# Altium PCB PCB_PRO_OK_08-08-2011.PcbDoc (part 1 of 2)
Units mil, origin at the board's own origin, x right, y up, seen from the top; angles counter-clockwise.
Board outline 6942 x 4824 mil, 2 copper layers (Top Layer, Bottom Layer); 164 components, 92 nets, 659 pads, 68 vias.
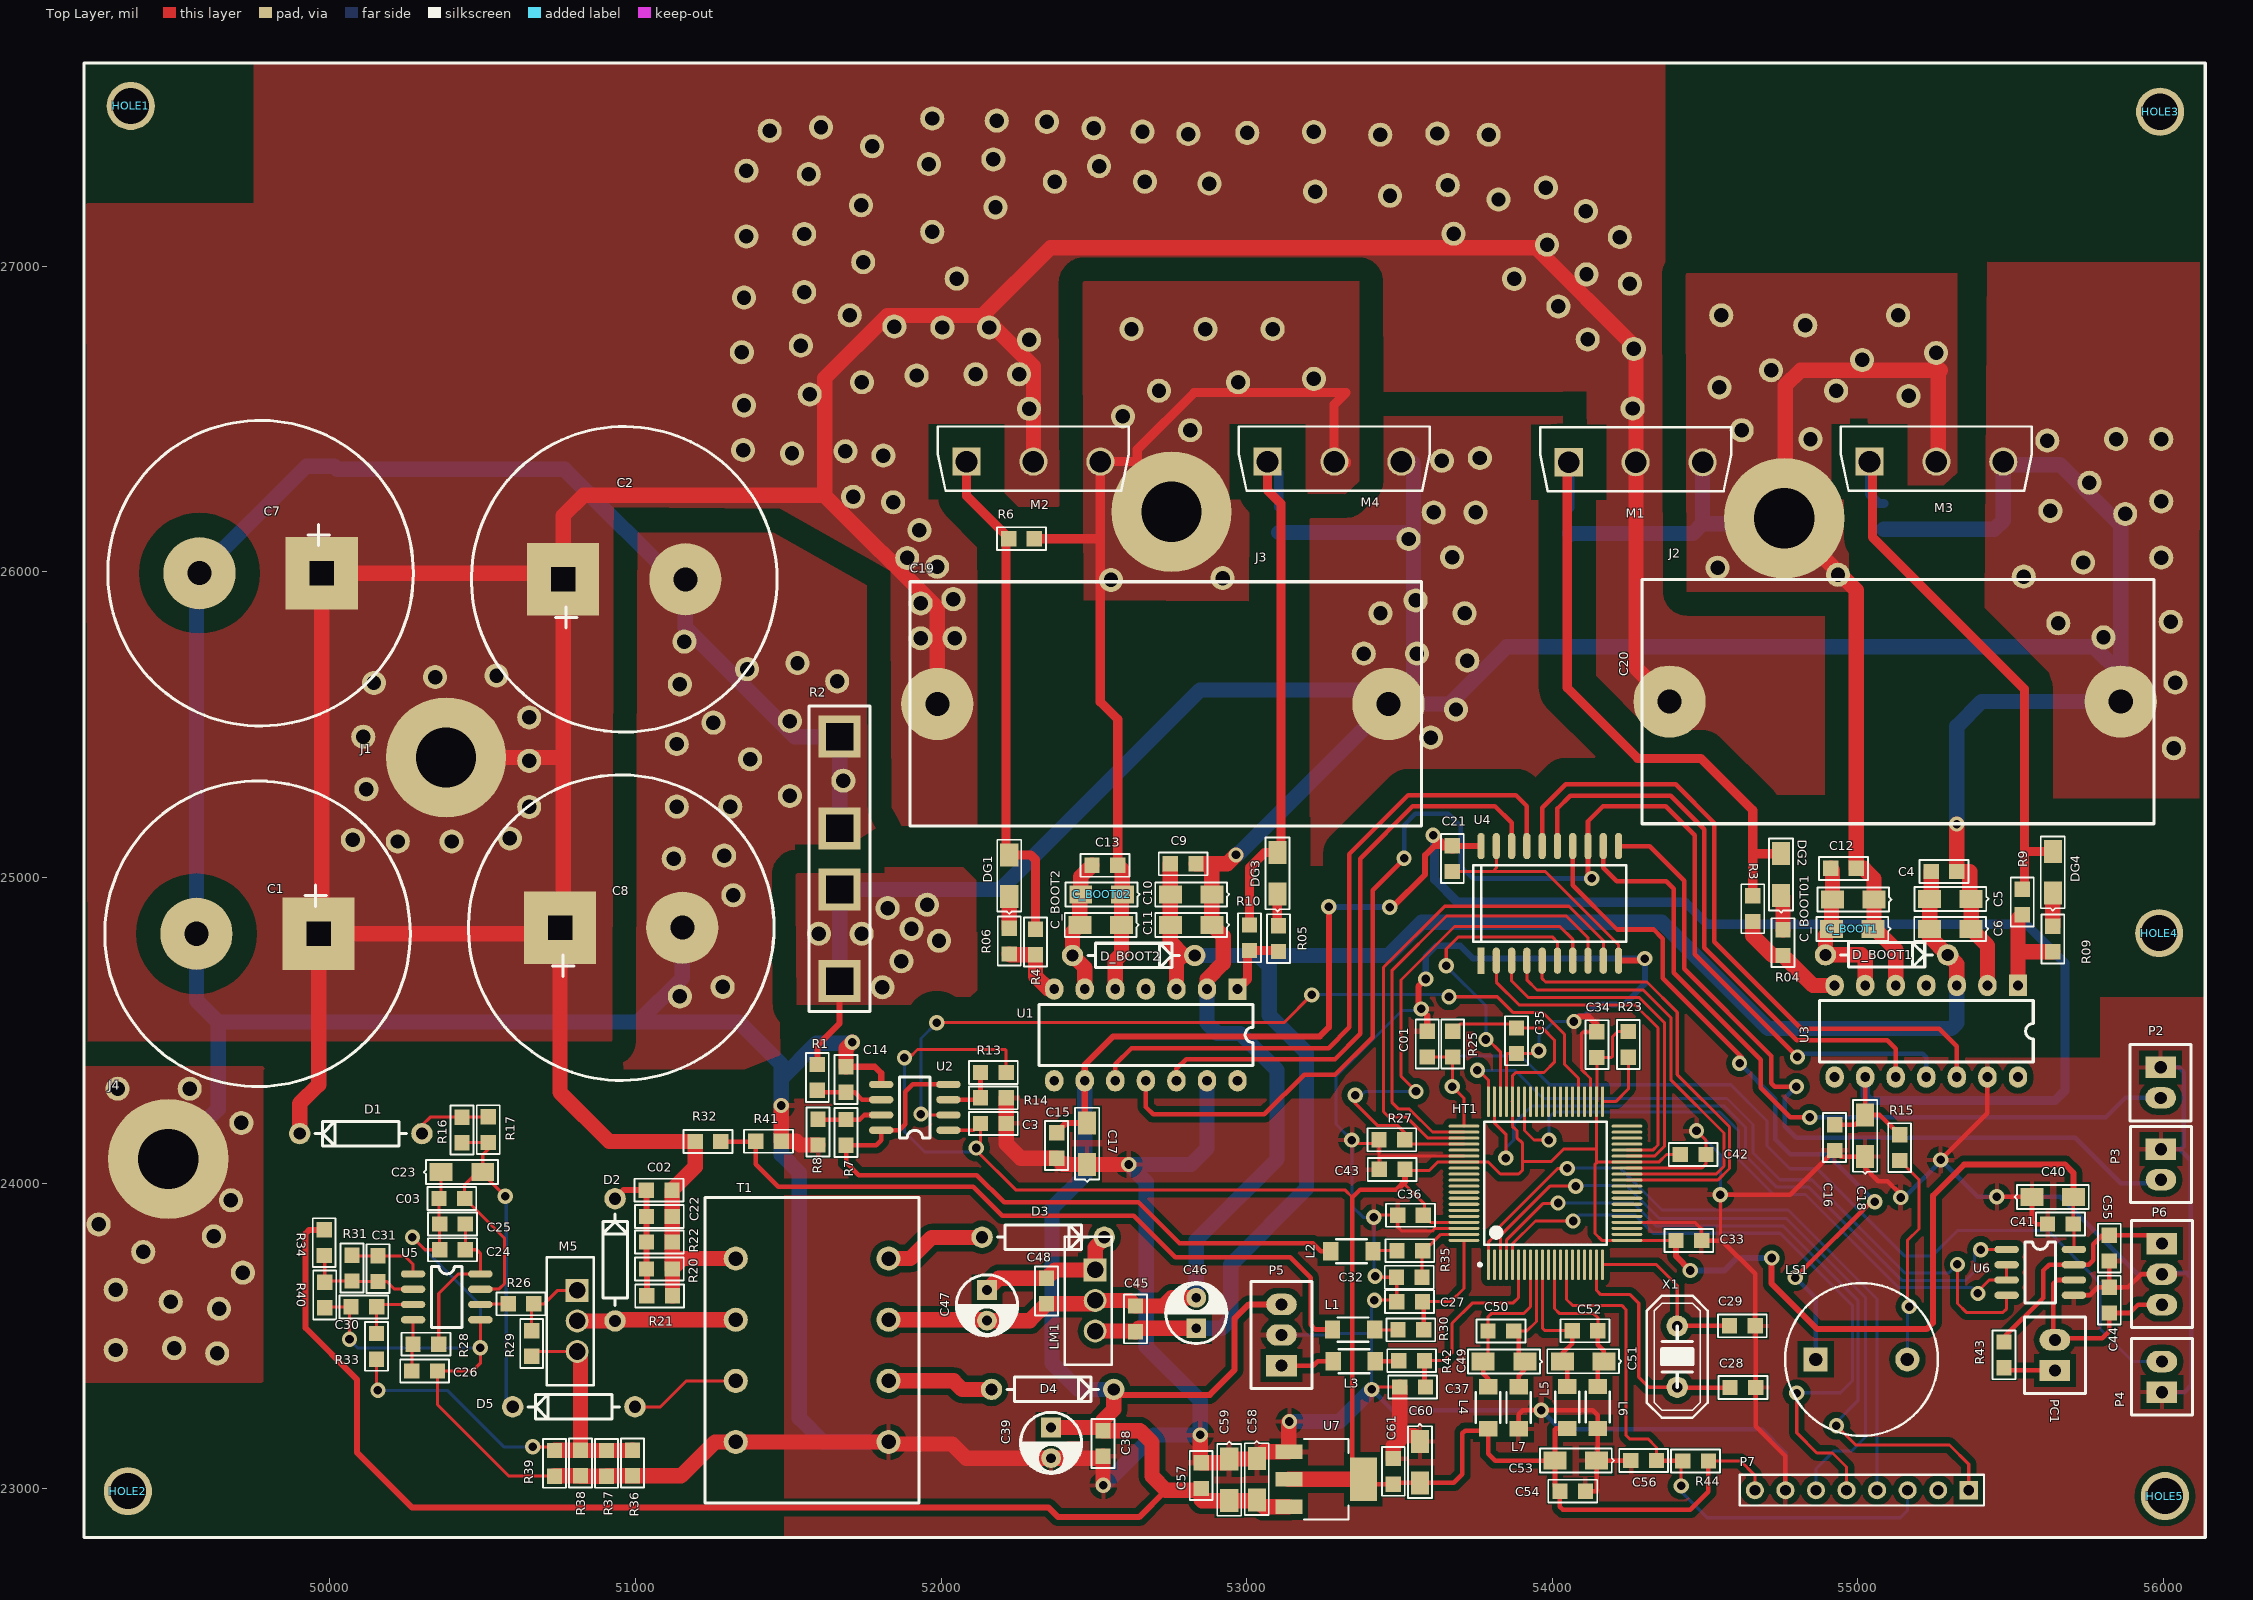
[diagram p0: Top Layer view]
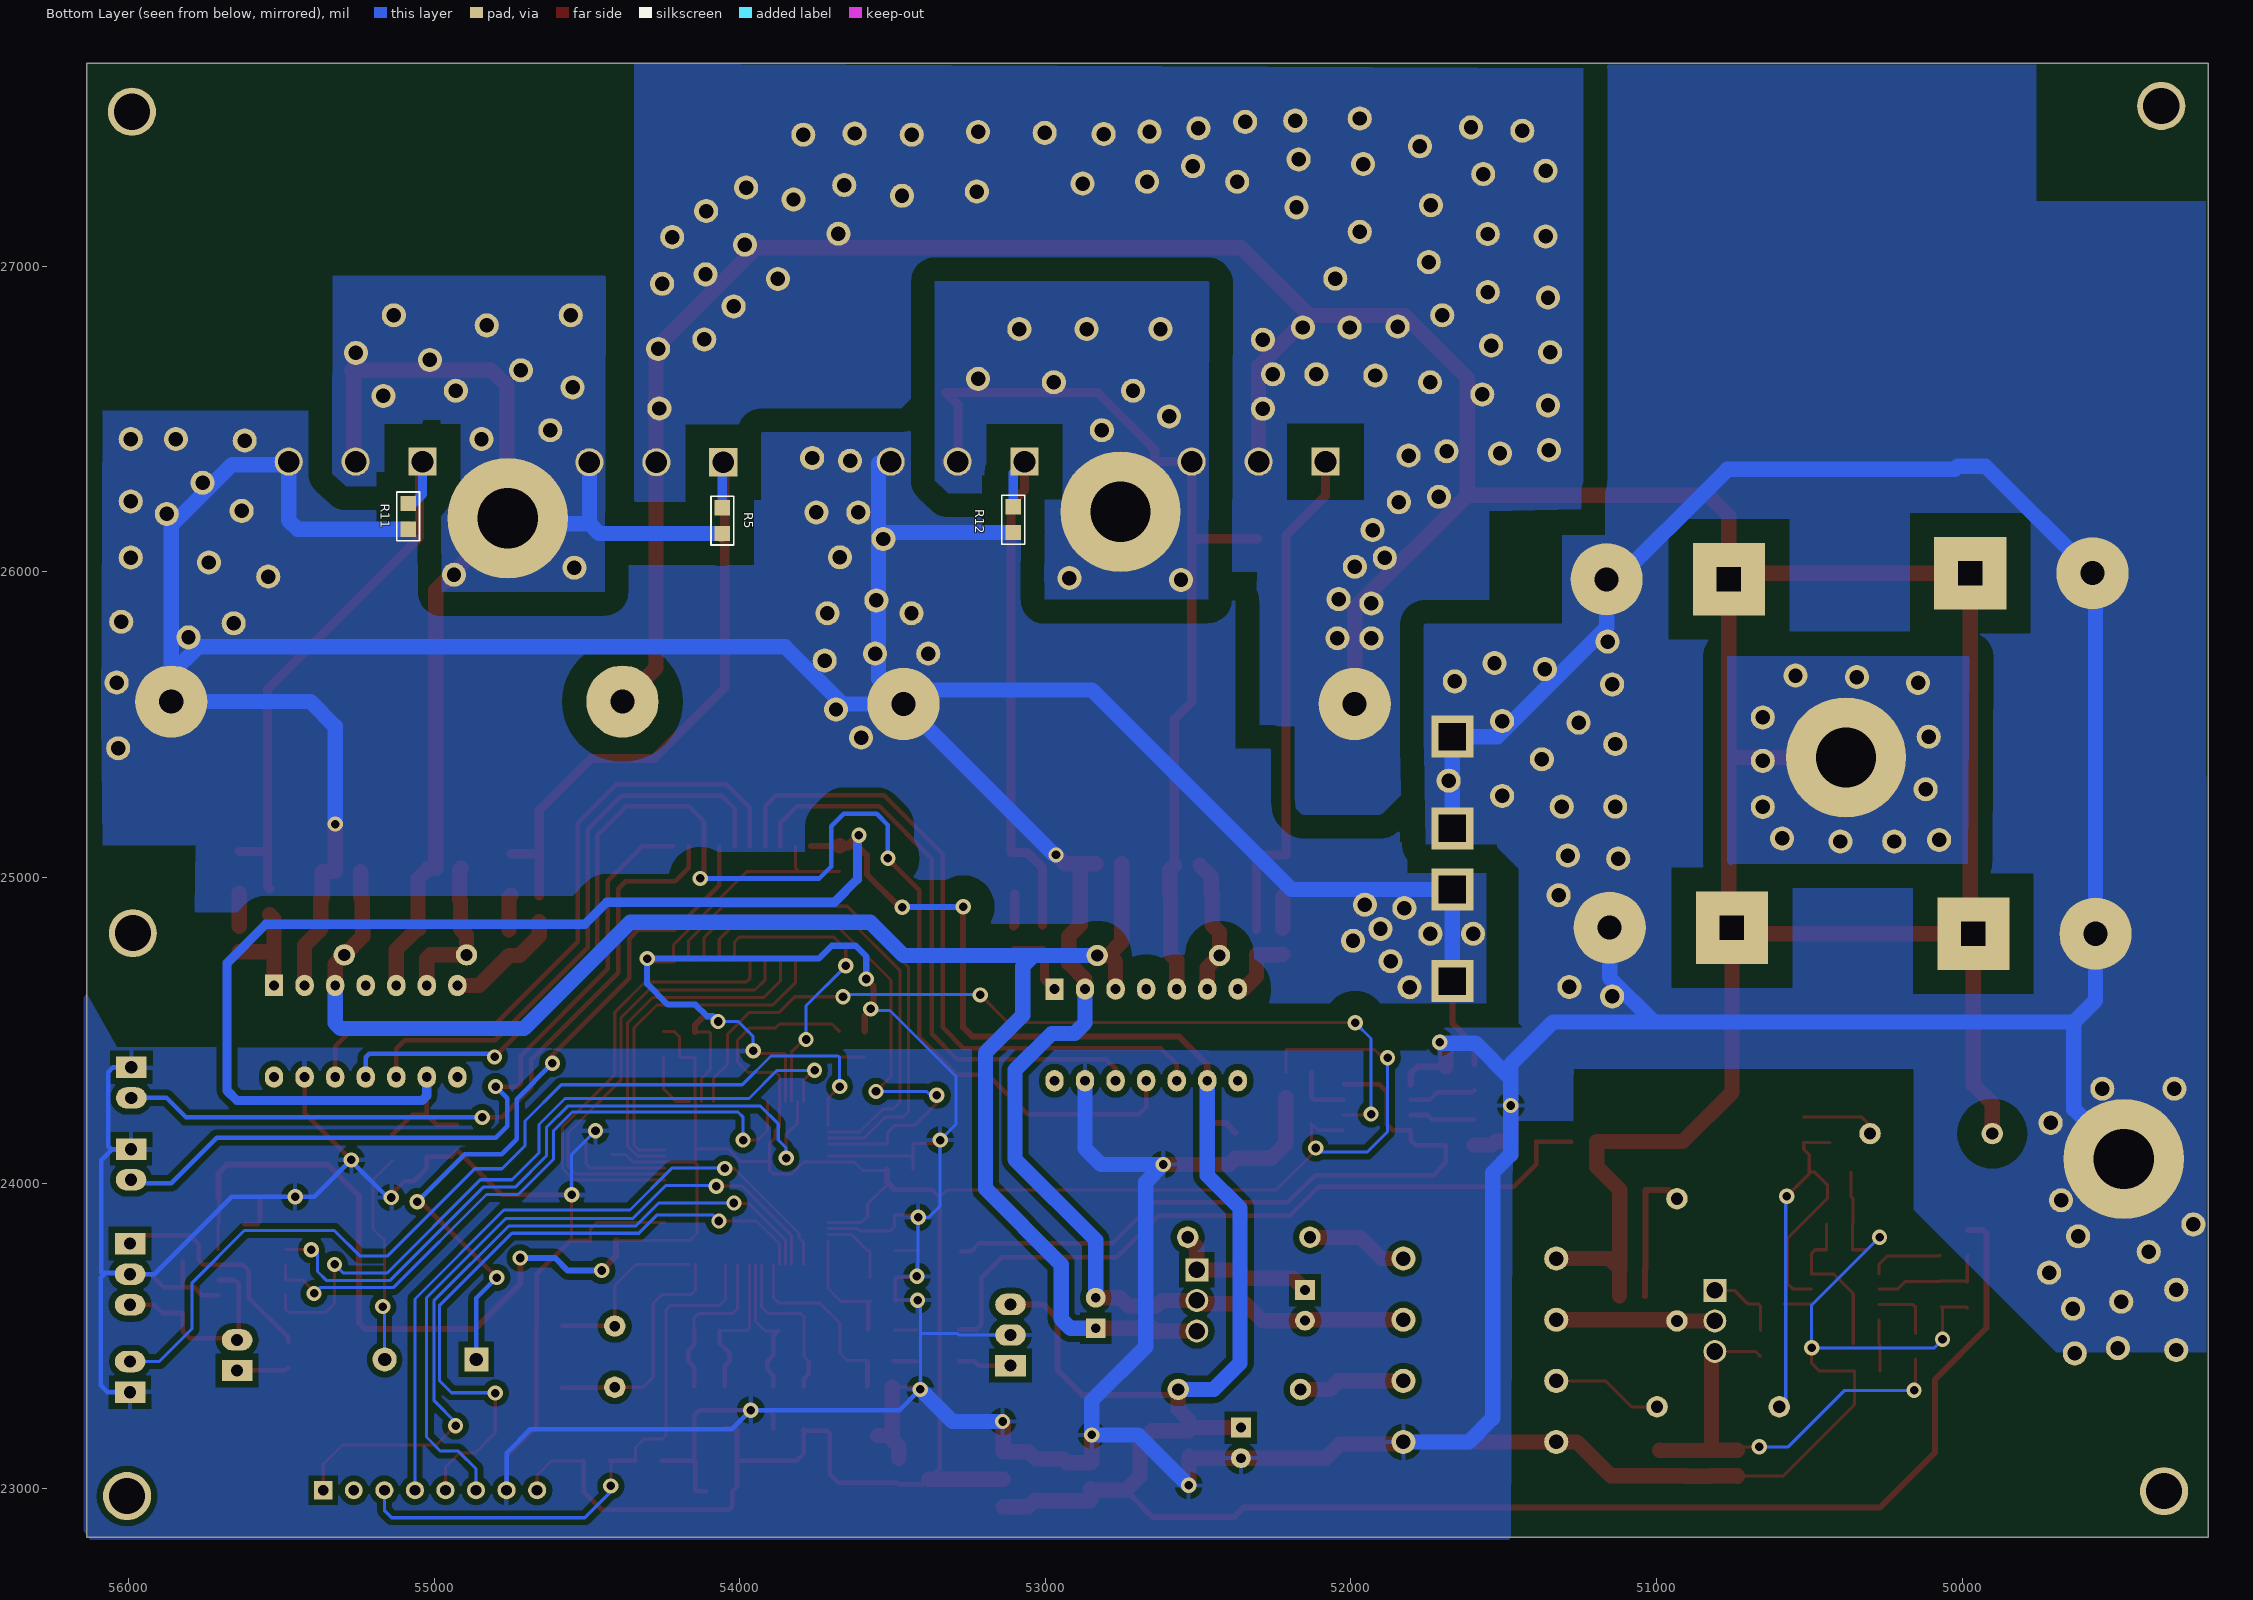
[diagram p1: Bottom Layer view, seen from below]

## Layer stack, top to bottom
Top Layer: signal copper 1.4
Dielectric: dielectric 12.6, FR-4, Dk 4.8
Bottom Layer: signal copper 1.4

## Board outline
49195,22841 56137,22841 56137,27665 49195,27665

## Design rules (kind name [scope] priority, off if disabled: settings)
Clearance YEN_CONTROL_1 [InNamedPolygon('GND_BOT_VSL') Or  InNamedPolygon('GND_CONTROL')] p1: gap=19.68
Clearance YEN_POWER_3 [InNamedPolygon('48V_VDC') Or  InNamedPolygon('GND_TOP_POWER') Or  InNamedPolygon('AC_OUT_TOP10') Or  InNamedPolygon('COM_S') Or  InNamedPolygon('48V_M+') Or  InNamedPolygon('COMS_SHUN') Or  InNamedPolygon('AC_OUT_TOP1') Or  InNamedPolygon('BOT_48V_BAT') Or  InNamedPolygon('COM_S_TOP') Or  InNamedPolygon('AC_OUT_TOP2') Or  InNamedPolygon('COM_S_TOP1') Or  InNamedPolygon('GND_SHUN') Or  InNamedPolygon('BOT_GND_BAT') Or  InNamedPolygon('AC_OUT_TOP3')] p2: gap=78.74
Clearance [All] p3: gap=8
ComponentClearance [All] p1: gap=0 collisioncheckmode=3 verticalgap=0 showdistances=FALSE
HoleSize [All] p1: absolutevalues=TRUE maxlimit=200 minlimit=1 maxpercent=80.000 minpercent=20.000
HoleToHoleClearance [All] p1: gap=8 allowstackedmicrovias=TRUE
MinimumSolderMaskSliver [All] p1: minsoldermaskwidth=1
PolygonConnect YEN_CONTROL [All vs IsNamedPolygon('GND_BOT_VSL') Or  IsNamedPolygon('GND_CONTROL')] p1: connectstyle=Relief reliefconductorwidth=15 reliefentries=4 polygonreliefangle="90 Angle"
PolygonConnect YEN_POWER [All vs IsNamedPolygon('BOT_48V_BAT') Or  IsNamedPolygon('AC_OUT_TOP1') Or  IsNamedPolygon('COM_S_TOP1') Or  IsNamedPolygon('GND_SHUN') Or  IsNamedPolygon('GND_TOP_POWER') Or  IsNamedPolygon('AC_OUT_TOP3') Or  IsNamedPolygon('AC_OUT_TOP10') Or  IsNamedPolygon('COM_S_TOP') Or  IsNamedPolygon('AC_OUT_TOP2') Or  IsNamedPolygon('COMS_SHUN') Or  IsNamedPolygon('48V_M+') Or  IsNamedPolygon('BOT_GND_BAT') Or  IsNamedPolygon('48V_VDC') Or  IsNamedPolygon('COM_S')] p2: connectstyle=Direct reliefconductorwidth=10 reliefentries=4 polygonreliefangle="90 Angle"
PolygonConnect [All] p3: connectstyle=Relief reliefconductorwidth=10 reliefentries=4 polygonreliefangle="90 Angle"
RoomDefinition overview [InComponentClass('overview')] p1: confinementstyle=ConfineIn formatcopy=TRUE lockcomponents=FALSE outline 48945,22757 56212,22757 56212,27795 48945,27795
RoutingVias [All] p1: holewidth=28 width=50 viastyle="Through Hole" minholewidth=28 minwidth=50 maxholewidth=28 maxwidth=50
SilkToSilkClearance [All] p1: silktosilkclearance=0
SilkscreenOverComponentPads [All] p1: minsilkscreentomaskgap=0
SolderMaskExpansion [All] p1: expansion=4
Width [All] p1: maxlimit=100 minlimit=10 preferedwidth=10
22 further rules are at their usual default settings.

## Classes and differential pairs
polygon class BOT_GND_BAT: BOT_GND_BAT

## Components (designator, comment, footprint, x,y, rotation, side; value= is the part's Value field where it differs from the comment)
C01 "CX4" C0805#1 53431,24953 r270 top
C1 "3300uF-100V" 3300uF_NEW 49563,24816 r0 top
C02 "CX4" C0805#1 51575,24137 r180 top
C2 "3300uF-100V" 3300uF_NEW 51163,25976 r180 top
C03 "CX4" C0805#1 50897,24110 r180 top
C3 "CX4" C0805#2 52669,24035 r180 top
C4 "cap SMD" C0805#1 55780,25180 r180 top
C5 "10uF" CAP_10uF_SMD#1 55163.3,25342.8 r270 top
C6 "10uF" CAP_10uF_SMD#1 55162.3,25244.8 r270 top
C7 "3300uF-100V" 3300uF_NEW 49573,25996 r0 top
C8 "3300uF-100V" 3300uF_NEW 51153,24836 r180 top
C9 "cap SMD" C0805#1 53290,25205 r180 top
C10 "10uF" CAP_10uF_SMD#1 52678.3,25357.8 r270 top
C11 "10uF" CAP_10uF_SMD#1 52678.3,25257.8 r270 top
C12 "cap SMD" C0805#1 55451,25190 r180 top
C13 "cap SMD" C0805#1 53034,25200 r180 top
C14 "CX4" C0805#2 51849,24837 r270 top
C15 "CX4" C0805#1 52538,23625 r90 top
C16 "CX4" C0805#1 55084,23651 r90 top
C17 "CAP SMD1206" CAP_10uF_SMD#1 52890.8,24268.7 r180 top
C18 "CAP SMD1206" CAP_10uF_SMD#1 55436.8,24294.7 r180 top
C19 "polypropylen" 2.2UF-1000V_NEW 51987.62,25568 r0 top
C20 "polypropylen" 2.2UF-1000V_NEW 54384,25576 r0 top
C21 "cap SMD" C0805#1 53833,24564 r90 top
C22 "CX4" C0805#1 51576,24051 r180 top
C23 "CAP SMD1206" CAP_10uF_SMD#1 50571.7,23623.2 r90 top
C24 "CX4" C0805#1 50899,23942 r180 top
C25 "CX4" C0805#1 50899,24026 r180 top
C26 "CX4" C0805#1 49812,23225 r0 top
C27 "CX4" C0805#1 53035,23452 r0 top
C28 "CX4" C0805#1 55122,23491 r180 top
C29 "CX4" C0805#1 55120,23693 r180 top
C30 "CX4" C0805#1 49613,23435 r0 top
C31 "CX4" C0805#1 49997,24218 r270 top
C32 "CX4" C0805#1 53034,23532 r0 top
C33 "CX4" C0805#1 54945,23972 r180 top
C34 "CX4" C0805#1 53986,24951 r270 top
C35 "CX4" C0805#1 54043,23968 r90 top
C36 "CX4" C0805#1 53038,23735 r0 top
C37 "CX4" C0805#1 53045,23173 r0 top
C38 "CX4" C0805#1 52370,23646 r270 top
C39 "CAP SMD1206" Tu470 52775,23130 r180 top
C40 "10uF" CAP_10uF_SMD#1 55777.7,23542.2 r90 top
C41 "CX4" C0805#1 55165,23706 r0 top
C42 "CX4" C0805#1 54959,24254 r180 top
C43 "CX4" C0805#1 52978,23885 r0 top
C44 "CX4" C0805#1 55983,23119 r90 top
C45 "CX4" C0805#1 52796,23058 r90 top
C46 "CAP SMD1206" Tu470 52420,23595 r0 top
C47 "CAP SMD1206" Tu470 52565,23580 r180 top
C48 "CX4" C0805#1 52185,24145 r270 top
C49 "10uF" CAP_10uF_SMD#1 53702.3,23828.8 r270 top
C50 "CX4" C0805#1 54330,23676 r180 top
C51 "10uF" CAP_10uF_SMD#1 53961.3,23829.8 r270 top
C52 "CX4" C0805#1 54605,23677 r180 top
C53 "10uF" CAP_10uF_SMD#1 53937.3,23504.8 r270 top
C54 "CX4" C0805#1 54565,23152 r180 top
C55 "CX4" C0805#1 55983,23289 r90 top
C56 "CX4" C0805#1 53801,22932 r0 top
C57 "CX4" C0805#2 53011,23541 r270 top
C58 "CAP SMD1206" CAP_10uF_SMD#2 53445.8,22891.3 r180 top
C59 "CAP SMD1206" CAP_10uF_SMD#2 53355.8,22889.3 r180 top
C60 "CAP SMD1206" CAP_10uF_SMD#1 53154.2,22947.3 r0 top
C61 "CX4" C0805#1 53320,23555 r270 top
C_BOOT1 "10u" CAP_10uF_SMD#1 54842.3,25244.8 r270 top
C_BOOT01 "10u" CAP_10uF_SMD#1 54845.3,25340.8 r270 top
C_BOOT2 "10uF" CAP_10uF_SMD#1 52382.3,25257.8 r270 top
C_BOOT02 "10uF" CAP_10uF_SMD#1 52385.3,25357.8 r270 top
D1 "FR107" DIODE5819_V1 50031,24577 r270 top
D2 "FR107" DIODE5819_V1 51348,23819 r180 top
D3 "1N5819" DIODE5819_V1 52404,23408 r90 top
D4 "1N5819" DIODE5819_V1 52435,22910 r90 top
D5 "1N5819" DIODE5819_V1 50728,23683 r270 top
D_BOOT1 "UF4007" DIODE5819_V1 55164,24332 r90 top
D_BOOT2 "UF4007" DIODE5819_V1 52700,24330 r90 top
DG1 "4148" 4148_SMD 52009.67,25414.33 r270 top
DG2 "4148" 4148_SMD 54535.67,25418.33 r270 top
DG3 "4148" 4148_SMD 52887.67,25422.33 r270 top
DG4 "4148" 4148_SMD 55424.67,25425.33 r270 top
HOLE1 "HOLE1" HOLE 49623,27180 r90 top
HOLE2 "HOLE1" HOLE 49614,22647 r90 top
HOLE3 "HOLE1" HOLE 56264,27161 r90 top
HOLE4 "HOLE1" HOLE 56261,24473 r90 top
HOLE5 "HOLE1" HOLE 56280,22631 r90 top
HT1 "LPC175x" "PCBComponent_1 - duplicate" 53910.79,25266.73 r0 top
J1 "Socket" DAY_50A 50740,25533 r180 top
J2 "J1" DAY_50A 54899,25816 r90 top
J3 "J1" DAY_50A 52894,25837 r90 top
J4 "J1" DAY_50A 49611,23719 r90 top
L1 "Inductor" L_1uH 52826,23351 r0 top
L2 "Inductor" L_1uH 52820.21,23607 r0 top
L3 "Inductor" L_1uH 52828.21,23247 r0 top
L4 "Inductor" L_1uH 53620,23788.79 r270 top
L5 "Inductor" L_1uH 53879,23789.79 r270 top
L6 "Inductor" L_1uH 53979,23789.79 r270 top
L7 "Inductor" L_1uH 53720,23788.79 r270 top
LM1 "7812" TO220AB 52092.73,23439.83 r0 top
LS1 "SPEAKER" BUZZ 54843.7,23926.37 r270 top
M1 "IRFP4468PBF-ND" TO247AB 54054,26359 r0 top
M2 "IRFP4468PBF-ND" TO247AB 52083,26361 r0 top
M3 "IRFP4468PBF-ND" TO247AB 55038,26361 r0 top
M4 "IRFP4468PBF-ND" TO247AB 53068,26361 r0 top
M5 "IRF640" TO220AB 50397.73,23372.83 r0 top
P2 "Header 2" CONECTOR_2PIN 56056,24739 r270 top
P3 "Header 2" CONECTOR_2PIN 56057,24471 r270 top
P4 "Header 2" CONECTOR_2PIN 55930,22956 r90 top
P5 "LM35 -Temperature Sensors" CONECTOR_3PIN 53464,23563 r180 top
P6 "Header 3" CONECTOR_3PIN 55645,23642 r0 top
P7 "Header 8" HDR1X8 55363,22995 r180 top
PC1 "JUMPER" CONECTOR_2PIN 55580,23027 r90 top
R1 "Resistor SMD0805" R0805#1 51375,23918 r90 top
R2 "Shun" RES_SHUN 51668,25461 r270 top
R3 "Resistor SMD0805" R0805#2 54436,25326 r270 top
R4 "Resistor SMD0805" R0805#2 52529,24361 r90 top
R04 "Resistor SMD0805" R0805#2 54535,25215 r270 top
R5 "Resistor SMD0805" R0805#2 54277,26596 r270 bottom
R05 "Resistor SMD0805" R0805#2 53324,24372 r90 top
R6 "Resistor SMD0805" R0805#2 51835,25889 r0 top
R06 "Resistor SMD0805" R0805#2 52443,24364 r90 top
R7 "Resistor SMD0805" R0805#1 51909,24594 r270 top
R8 "Resistor SMD0805" R0805#1 51817,24595 r270 top
R9 "Resistor SMD0805" R0805#2 55318,25348 r270 top
R09 "Resistor SMD0805" R0805#2 55418,25227 r270 top
R10 "Resistor SMD0805" R0805#2 53229,24375 r90 top
R11 "Resistor SMD0805" R0805#2 55305,26610 r270 bottom
R12 "Resistor SMD0805" R0805#2 53325,26599 r270 bottom
R13 "Resistor SMD0805" R0805#1 52599,24142 r180 top
R14 "Resistor SMD0805" R0805#1 51743,24499 r0 top
R15 "Resistor SMD0805" R0805#2 55357,23688 r90 top
R16 "Resistor SMD0805" R0805#2 50212,24602 r270 top
R17 "Resistor SMD0805" R0805#2 50298,24603 r270 top
R20 "Resistor SMD0805" R0805#2 51506,23939 r180 top
R21 "Resistor SMD0805" R0805#2 51507,23851 r180 top
R22 "Resistor SMD0805" R0805#2 51506,24027 r180 top
R23 "Resistor SMD0805" R0805#2 54469,24026 r90 top
R25 "Resistor SMD0805" R0805#2 53894,24027 r90 top
R26 "Resistor SMD0805" R0805#2 51053,23825 r180 top
R27 "Resistor SMD0805" R0805#2 53047,23922 r0 top
R28 "Resistor SMD0805" R0805#2 49886,23253 r0 top
R29 "Resistor SMD0805" R0805#2 50440,23903 r270 top
R30 "Resistor SMD0805" R0805#2 53965,23740 r180 top
R31 "Resistor SMD0805" R0805#2 50292,23294 r90 top
R32 "Resistor SMD0805" R0805#2 51665,24356 r180 top
R33 "Resistor SMD0805" R0805#2 49932,23894 r270 top
R34 "Resistor SMD0805" R0805#2 50201,23377 r90 top
R35 "Resistor SMD0805" R0805#2 53962,23999 r180 top
R36 "Resistor SMD0805" R0805#2 50770,23512 r270 top
R37 "Resistor SMD0805" R0805#2 50685,23511 r270 top
R38 "Resistor SMD0805" R0805#2 50600,23512 r270 top
R39 "Resistor SMD0805" R0805#2 50515,23511 r270 top
R40 "Resistor SMD0805" R0805#2 50203,23206 r90 top
R41 "Resistor SMD0805" R0805#2 51863,24357 r180 top
R42 "Resistor SMD0805" R0805#2 53968,23639 r180 top
R43 "120" R0805#2 55258,23866 r270 top
R44 "Resistor SMD0805" R0805#2 54041,22871 r0 top
T1 "EE25" TRANSFORMER 51328,23753 r270 top
U1 "IR2110" 74HC14 53310,24600 r180 top
U2 "LM358" SOIC_8PIN#1 52322.86,24099.81 r180 top
U3 "IR2110" 74HC14 55864,24612 r180 top
U4 "74HCT245" 74HCT245D_STO163 53940.33,25197.6 r270 top
U5 "KA3842" SOIC_8PIN#2 50791,23776 r180 top
U6 "SN75176A" SOIC_8PIN#2 56005.86,23856.19 r180 top
U7 "LM1117S33" LM1117 53013,23426 r270 top
X1 "12MHZ" CRYSTAL_12Mhz 54562.14,23009.21 r90 top

## Footprints (in the part's own frame and the unit in brackets; to place one, negate y for a bottom-side part, rotate by r counter-clockwise, add the part's x,y. Pads: shape width x height; smd on the part's side, far side on the other; paste and mask are expansions set on the pad)
2.2UF-1000V_NEW [mm]
  round 6 hole 2: 1(0,0) 2(37.5,0)
  silkscreen extent -2.29,-10.16 40.26,10.16
74HC14 [mil]
  rect 60x70 hole 32: 1(340,-35)
  oval 60x70 hole 32: 2(440,-35) 3(540,-35) 4(640,-35) 5(740,-35) 6(840,-35) 7(940,-35) 8(940,265) 9(840,265) 10(740,265) 11(640,265) 12(540,265) 13(440,265) 14(340,265)
  silkscreen extent 290,15 990,215
74HCT245D_STO163 [mil]
  rect 86x24 smd: 1(469.6,-173.33)
  oval 86x24 smd: 2(469.6,-123.33) 3(469.6,-73.33) 4(469.6,-23.33) 5(469.6,26.67) 6(469.6,76.67) 7(469.6,126.67) 8(469.6,176.67) 9(469.6,226.67) 10(469.6,276.67) 11(94.6,276.67) 12(94.6,226.67) 13(94.6,176.67) 14(94.6,126.67) 15(94.6,76.67) 16(94.6,26.67) 17(94.6,-23.33) 18(94.6,-73.33) 19(94.6,-123.33) 20(94.6,-173.33)
  silkscreen extent 157,-198 407,302
3300uF_NEW [mm]
  rect 6x6 hole 2 square: 1(10.16,0)
  round 6 hole 2: 2(0,0)
  silkscreen extent -7.62,-12.7 17.78,12.7
4148_SMD [mil]
  rect 75.2x59.03 smd: 1(340.33,213.33) 2(476.33,213.33)
  silkscreen extent 291,174 533,253
BUZZ [mil]
  rect 78.73x78.73 hole 43.3: 1(503.37,18.3)
  round 78.73 hole 43.3: 2(503.37,318.3)
  silkscreen extent 253,-82 753,418
C0805#1 [mil]
  rect 50x50 smd: 1(456,160) 2(540,160)
  silkscreen extent 418,123 578,198
C0805#2 [mil]
  rect 50x50 smd: 1(456,-160) 2(540,-160)
  silkscreen extent 418,-197 578,-122
CAP_10uF_SMD#1 [mil]
  rect 59.03x75.2 smd: 1(412.8,71.7) 2(412.8,207.7)
  silkscreen extent 373,22 452,265
CAP_10uF_SMD#2 [mil]
  rect 59.03x75.2 smd: 1(412.8,-71.7) 2(412.8,-207.7)
  silkscreen extent 373,-265 452,-22
CONECTOR_2PIN [mil]
  rect 70x100 hole 40: 1(360,-65)
  oval 70x100 hole 40: 2(460,-65)
  silkscreen extent 285,-165 535,35
CONECTOR_3PIN [mil]
  rect 100x70 hole 40: 1(350,160)
  oval 100x70 hole 40: 2(350,60) 3(350,-40)
  silkscreen extent 250,-115 450,235
CRYSTAL_12Mhz [mil]
  round 70 / inner round 60 / far side round 70 hole 35 mask+8: 1(322.79,153.14) 2(522.79,153.14)
  silkscreen extent 223,53 623,253
DAY_50A [mm]
  round 10 hole 5: 1(9.144,3.556)
DIODE5819_V1 [mil]
  round 70 hole 40: 1(415,-130) 2(415,270)
  silkscreen extent 375,-80 455,220
HDR1X8 [mm] "Connector; Header; 8 Position"
  rect 1.5x1.5 hole 0.9: 1(0,0)
  round 1.5 hole 0.9: 2(2.54,0) 3(5.08,0) 4(7.62,0) 5(10.16,0) 6(12.7,0) 7(15.24,0) 8(17.78,0)
  silkscreen extent -1.27,-1.27 19.05,1.27
HOLE [mm]
  round 4 hole 3: 1(8.763,6.985)
L_1uH [mil]
  rect 50x60 smd: 1(455,170) 2(592.79,170)
  silkscreen extent 472,130 572,209
LM1117 [mil]
  rect 48x88 smd: 1(305,125) 2(395,125) 3(485,125)
  rect 142x88 smd: 4(395,369)
  silkscreen extent 263,174 527,320
"PCBComponent_1 - duplicate" [mil]
  oval 10x100.39 smd: 1(-120.01,-1533.73) 2(-100.32,-1533.73) 3(-80.64,-1533.73) 4(-60.95,-1533.73) 5(-41.27,-1533.73) 6(-21.58,-1533.73) 7(-1.9,-1533.73) 8(17.79,-1533.73) 9(37.47,-1533.73) 10(57.16,-1533.73) 11(76.84,-1533.73) 12(96.53,-1533.73) 13(116.21,-1533.73) 14(135.9,-1533.73) 15(155.58,-1533.73) 16(175.27,-1533.73) 17(194.95,-1533.73) 18(214.64,-1533.73) 19(234.32,-1533.73) 20(254.01,-1533.73) 41(254.01,-1000.27) 42(234.32,-1000.27) 43(214.64,-1000.27) 44(194.95,-1000.27) 45(175.27,-1000.27) 46(155.58,-1000.27) 47(135.9,-1000.27) 48(116.21,-1000.27) 49(96.53,-1000.27) 50(76.84,-1000.27) 51(57.16,-1000.27) 52(37.47,-1000.27) 53(17.79,-1000.27) 54(-1.9,-1000.27) 55(-21.58,-1000.27) 56(-41.27,-1000.27) 57(-60.95,-1000.27) 58(-80.64,-1000.27) 59(-100.32,-1000.27) 60(-120.01,-1000.27)
  oval 100.39x10 smd: 21(333.73,-1454.01) 22(333.73,-1434.32) 23(333.73,-1414.64) 24(333.73,-1394.95) 25(333.73,-1375.27) 26(333.73,-1355.58) 27(333.73,-1335.9) 28(333.73,-1316.21) 29(333.73,-1296.53) 30(333.73,-1276.84) 31(333.73,-1257.16) 32(333.73,-1237.47) 33(333.73,-1217.79) 34(333.73,-1198.1) 35(333.73,-1178.42) 36(333.73,-1158.73) 37(333.73,-1139.05) 38(333.73,-1119.36) 39(333.73,-1099.68) 40(333.73,-1079.99) 61(-199.73,-1079.99) 62(-199.73,-1099.68) 63(-199.73,-1119.36) 64(-199.73,-1139.05) 65(-199.73,-1158.73) 66(-199.73,-1178.42) 67(-199.73,-1198.1) 68(-199.73,-1217.79) 69(-199.73,-1237.47) 70(-199.73,-1257.16) 71(-199.73,-1276.84) 72(-199.73,-1296.53) 73(-199.73,-1316.21) 74(-199.73,-1335.9) 75(-199.73,-1355.58) 76(-199.73,-1375.27) 77(-199.73,-1394.95) 78(-199.73,-1414.64) 79(-199.73,-1434.32) 80(-199.73,-1454.01)
  silkscreen extent -152,-1539 268,-1066, body extent -150,-1484 284,-1050, height 59
R0805#1 [mil]
  rect 50x50 smd: 1(386,-220) 2(470,-220)
  silkscreen extent 348,-258 508,-182
R0805#2 [mil]
  rect 50x50 smd: 1(386,220) 2(470,220)
  silkscreen extent 348,183 508,258
RES_SHUN [mm]
  rect 3.5x3.5 hole 2.26 square: 1(0,0) 2(7.62,0) 3(12.7,0) 4(20.32,0)
  silkscreen extent -2.54,-2.54 22.86,2.54
SOIC_8PIN#1 [mil]
  oval 80x24 smd: 1(518.86,-73.19) 2(518.86,-123.19) 3(518.86,-173.19) 4(518.86,-223.19) 5(298.86,-223.19) 6(298.86,-173.19) 7(298.86,-123.19) 8(298.86,-73.19)
  silkscreen extent 359,-248 459,-48
SOIC_8PIN#2 [mil]
  oval 80x24 smd: 1(518.86,73.19) 2(518.86,123.19) 3(518.86,173.19) 4(518.86,223.19) 5(298.86,223.19) 6(298.86,173.19) 7(298.86,123.19) 8(298.86,73.19)
  silkscreen extent 359,48 459,248
TO220AB [mil]
  rect 75x75 hole 54: 1(411.27,276.17)
  round 75 hole 54: 2(411.27,176.17) 3(411.27,76.17)
  silkscreen extent 311,-35 465,385
TO247AB [mil]
  rect 92x92 hole 71: 1(0,0)
  round 92 hole 71: 2(219,0) 3(438,0)
  silkscreen extent -94,-95 532,115
TRANSFORMER [mm]
  round 2 hole 1.2: 1(0,0) 2(5.08,0) 3(10.16,0) 4(15.24,0) 5(15.24,12.7) 6(10.16,12.7) 7(5.08,12.7) 8(0,12.7)
  silkscreen extent -5.08,-2.54 20.32,15.24
Tu470 [mil]
  rect 65x65 hole 32: 1(415,-70)
  round 65 hole 32: 2(415,30)
  silkscreen extent 315,-120 515,80

## Part data
C01 C02 C03 C3 C4 C9 C12 C13 C14 C15 C16 C21 C22 C24 C25 C26 C27 C28 C29 C30 C31 C32 C33 C34 C35 C36 C37 C38 C41 C42 C43 C44 C45 C48 C50 C52 C54 C55 C56 C57 C61: library part Cap, "Capacitor Type 0805 SMD"
C1 C2 C5 C6 C7 C8 C10 C11: library part CAP
C17 C18 C23 C39 C46 C47 C58 C59 C60: library part Cap2, "Capacitor"
C19 C20: library part "Cap Semi", "Capacitor polypropylen"
C40 C49 C51 C53: library part C
C_BOOT1 C_BOOT01 C_BOOT2 C_BOOT02: library part C_Dup1
D1 D2 D3 D4 D5: library part 1N4148
D_BOOT1 D_BOOT2 DG1 DG2 DG4: library part DIODE
DG3: library part DIODE_0
HOLE1 HOLE2 HOLE3 HOLE4 HOLE5: library part Plug, "HOLE"
J2 J3 J4: library part Socket, "Socket"
L1 L2 L3 L4 L5 L6 L7: "Inductor Type 1206 SMD"
LM1: library part Component_1
M1 M2 M3 M4 M5: library part IRF540_Dup1
P2 P3 P4: "Header, 2-Pin"
P5: library part "Header 3", "Header, 3-Pin"
P6: "Header, 3-Pin"
P7: "Header, 8-Pin"
PC1: library part "Header 2", "Header, 2-Pin"
R1 R3 R4 R04 R5 R05 R6 R06 R7 R8 R9 R09 R10 R11 R12 R13 R14 R15 R16 R17 R20 R21 R22 R23 R25 R26 R27 R28 R29 R30 R31 R32 R33 R34 R35 R36 R37 R38 R39 R40 R41 R42 R44: library part Res1
R43: library part R
T1: library part TRAN_FBP1S4/SM_5
U1: library part IR2110_2
U2: library part LM2904/ON
U5: library part KA3842_1
U6: library part SN75176A_0
U7: library part LM117_0
X1: library part QZS10MEG_0, "Thach anh 12MHZ"

## Free pads (board coordinates)
  round 78.74 hole 47.24: 1(51933,25783) 2(52044,25783) 3(52040,25911) 4(51933,25897) 5(51889,26046) 6(51987,26017) 7(51929,26137) 8(51843,26228) 9(51712,26246) 10(51811,26381) 11(51687,26395) 12(51512,26388) 13(51352,26399) 14(51355,26545) 15(51348,26719) 16(51355,26898) 17(51363,27098) 18(51363,27313) 19(51439,27444) 20(51607,27455) 21(51567,27302) 22(51552,27106) 23(51552,26916) 24(51541,26741) 25(51570,26581) 26(51741,26621) 27(51920,26643) 28(52113,26647) 29(52255,26647) 30(52288,26534) 31(52288,26760) 32(52157,26800) 33(52004,26800) 34(51847,26803) 35(51701,26840) 36(51745,27014) 37(51738,27200) 38(51774,27393) 39(51960,27335) 40(51971,27113) 41(52051,26960) 42(51971,27484) 43(52182,27477) 44(52171,27350) 45(52178,27193) 46(52346,27473) 47(52372,27277) 48(52499,27452) 49(52517,27328) 50(52659,27441) 51(52667,27277) 52(52809,27433) 53(53002,27437) 54(53220,27440) 55(53437,27431) 56(53624,27435) 57(53792,27431) 58(53824,27219) 59(54110,27181) 60(54221,27096) 61(54254,26943) 62(54267,26730) 63(54263,26535) 66(54116,26761) 67(54020,26869) 68(53875,26959) 69(53677,27107) 70(53469,27231) 71(53224,27245) 72(52878,27271) 73(53658,27266) 74(53979,27258) 75(53983,27071) 76(54112,26974) 77(55620,26430) 78(55845,26435) 79(55993,26435) 80(55993,26231) 81(55993,26047) 82(56024,25837) 83(56039,25638) 84(56034,25423) 85(55804,25786) 86(55656,25832) 87(55543,25985) 88(55630,26200) 89(55737,26031) 90(55875,26190) 91(55758,26292) 92(54620,26464) 93(54547,26604) 94(54553,26840) 95(54716,26660) 96(54541,26014) 97(54935,25991) 98(54845,26435) 99(54828,26807) 100(55132,26840) 101(55014,26694) 102(55166,26576) 103(54929,26593) 104(55256,26717) 105(52623,26795) 106(52865,26795) 107(53085,26795) 108(53220,26632) 109(52972,26621) 110(52713,26593) 111(52595,26509) 112(52815,26464) 113(52556,25974) 114(52921,25980) 115(49299,23454) 116(49490,23460) 117(49631,23443) 118(49637,23589) 119(49479,23612) 120(49299,23651) 121(49389,23775) 122(49620,23826) 123(49710,24197) 124(49541,24309) 125(49305,24309) 126(49243,23865) 127(49676,23944) 128(49715,23707) 129(51600,24816) 130(51740,24816) 131(51825,24900) 132(51954,24911) 133(51993,24793) 134(51870,24726) 135(51808,24641) 136(51903,24832) 137(50075,25123) 138(50222,25118) 139(50398,25118) 140(50589,25128) 141(50652,25231) 142(50652,25382) 143(50652,25524) 144(50545,25661) 145(50344,25656) 146(50144,25637) 147(50109,25461) 148(50119,25289) 149(53639,26364) 150(53763,26373) 151(53749,26195) 152(53612,26195) 153(53530,26108) 154(53672,26048) 155(53713,25865) 156(53553,25907) 157(53438,25865) 158(53383,25733) 159(53557,25733) 160(53722,25710) 161(53685,25550) 162(53603,25458) 163(51145,24611) 164(51285,24642) 165(51125,25062) 166(51290,25072) 167(51320,24942) 168(51135,25232) 169(51310,25232) 170(51135,25437) 171(51145,25632) 172(51255,25507) 173(51375,25387) 174(51505,25267) 175(51680,25317) 176(51505,25512) 177(51365,25682) 178(51160,25772) 182(51530,25702) 183(51660,25642)

## Via types
v1: diameter 50, hole 28, Top Layer to Bottom Layer, 68 vias

## Nets (pads, with @x,y where several pads share a name; then routed paths per layer and width w, separated by ;. In a path a pad name is that pad's centre, name@x,y a point inside that pad or via, vN(x,y) a via of type N, cw(c..) or ccw(c..) an arc to the next point about the centre after c; other vN are vias at no path point)
3V3: C3.2 C33.2 C34.2 C35.2 C36.2 C40.1 C41.2 C42.2 C43.2 C53.1 C54.2 C60.1 C61.2 HT1.21 HT1.34 HT1.42 HT1.56 HT1.67 HT1.77 L4.2 L5.2 P7.8 R13.1 R23.2 R25.2 R44.2 U2.8 U6.8 U7.2 U7.4 | length 11248.5
  Top Layer w10: v1@51896,24410 51923,24437 52211,24437 ; U2.8@52024,24173 52107,24173 C3.2@52129,24195 v1@52129,24129 ; v1(52115,24115) 52115,24107 52244,23978 53321,23978 53346,23953 ; R13.1@52213,24362 52213,24435 ; 53518,23995 53582.53,23930.47 C36.2@53582.53,23890.47 ; C43.2@53518,24045 53521,24042 53598,24042 53624.63,24068.63 HT1.67@53711.06,24068.63 53791.37,24068.63 53830,24030 53890,24030 53903,24043 53903,24071 ; C36.2@53578,23895 C36.2@53582.53,23890.47 ; R25.2@53674,24497 53698,24521 53870,24521 C35.2@53883,24508 53967,24508 54008,24467 54008,24397 53973,24362 53881,24362 53869.52,24350.52 HT1.56@53869.52,24266.46 ; HT1.77@53711.06,23871.78 53601.22,23871.78 C36.2@53582.53,23890.47 ; HT1.56@53869,24266.98 HT1.56@53869.52,24266.46 ; 54146.63,24068.63 HT1.34@54244.52,24068.63 54348.63,24068.63 54374,24094 C42.2@54419,24094 ; R23.2@54249,24496 54214,24496 54197,24479 54197,24414 54194,24411 C34.2@54146,24411 54146,24267.35 HT1.42@54145.11,24266.46 54145.11,24111 ; C33.2@54405,23812 54404.28,23812.72 HT1.21@54244.52,23812.72 54162.28,23812.72 54140,23835 54140,24062 54145.11,24067.11 54145.11,24111 ; R44.2@54511,23091 54616,23091 54663,23044 P7.8@54663,22995 ; C40.1@55706,23955 55705,23954 C41.2@55705,23866 55707,23864 U6.8@55707,23783 ; HT1.56@53869.52,24266.46 53869.52,24186.48 53884,24172 53884,24149 53903,24130 53903,24071 ; 53903,24071 53997,24071 54037,24111 54145.11,24111
  Top Layer w15: 53493,23979 53372,23979 53346,23953 53346,23067 U7.4@53382,23031 53398,23015 C61.2@53480,23015 53484,23019 C60.1@53567,23019 53678,23019 53706,23047 53706,23181 53715,23190 L4.2@53790,23190 ; L4.2@53790,23196 L4.2@53790,23190 ; L4.2@53794,23191 53793,23190 L4.2@53790,23190 ; L5.2@54049,23197 54012,23197 54009,23194 C53.1@54009,23092 ; R44.2@54511,23091 54511,22990 54452,22931 54035,22931 54025,22941 C54.2@54025,22992 54009,23008 C53.1@54009,23092 ; L4.2@53790,23190 53790,23115 53813,23092 C53.1@54009,23092
  Top Layer w20: 53493,23979 53518,24004 C43.2@53518,24045 ; C33.2@54405,23812 54405,23761 v1(54452,23714) ; v1(54718,23755) 54718,23671 54867,23522 55225,23522 55246,23543 55246,23959 55348,24061 55678,24061 55706,24033 C40.1@55706,23955
  Top Layer w50: U7.2@53138,23031 U7.4@53382,23031
  Bottom Layer w10: v1(51880,24410) 51880,24168 51946,24102 v1@52102,24102
  Bottom Layer w20: v1(54452,23714) 54563,23714 54604,23755 v1(54718,23755)
5V: C15.2 C16.2 C17.1 C18.1 C21.2 C38.1 C39.1 C57.2 C58.1 C59.1 D4.1 P5.3 R15.2 R34.2 U1.9 U3.9 U4.20 U7.3 | length 12828
  Top Layer w15: C38.1@52520,23200 C38.1@52530,23190 ; C57.2@52851,23001 C57.2@52855,22997 ; C58.1@53031,22961 C58.1@53033,22963 C58.1@53057,22963 ; C16.2@54924,24191 54992,24191 C18.1@55024,24223 ; U3.9@55024,24347 C18.1@55024,24223 ; R15.2@55137,24158 55072,24223 C18.1@55024,24223
  Top Layer w20: R34.2@49981,23847 49932,23847 49920,23835 49920,23526 50088,23358 50088,23119 50269,22938 52352,22938 52383,22907 52648,22907 52736,22995 ; C15.2@52378,24165 52410,24197 C17.1@52478,24197 52470,24205 U1.9@52470,24335 52470,24387 52563,24480 53239,24480 53269,24510 v1(53269,24904) ; D4.1@52565,23325 52583,23307 52879,23307 52960,23388 52960,23556 53007,23603 P5.3@53114,23603 ; v1@53477,24903 53584,25010 53584,25073 53615,25104 53644,25104 ; C21.2@53674,25103 U4.20@53767,25103
  Top Layer w30: v1(53610,25138) 53644,25104 53645,25103 C21.2@53674,25103
  Top Layer w50: C39.1@52360,23200 C38.1@52520,23200 ; D4.1@52565,23325 52565,23259 52530,23224 C38.1@52530,23190 52651,23190 52690,23151 52690,23041 52736,22995 52845,22995 C57.2@52851,23001 52851,22964 52854,22961 C59.1@52943,22961 C58.1@53031,22961 ; C58.1@53033,22963 53055,22941 U7.3@53138,22941 ; C21.2@53673,25104 C21.2@53674,25103
  Bottom Layer w20: v1@53270,24903 v1(53468,24903)
  Bottom Layer w30: v1(53610,25138) 53615,25138 53615,24994 53690,24919 54435,24919 54507,24847 55551,24847 55678,24720 55678,24303 55645,24270 55040,24270 55024,24286 U3.9@55024,24347
  Bottom Layer w50: U1.9@52470,24335 52470,24025 52363,23918 52363,23411 52449,23325 D4.1@52565,23325
48VDC: C1.1 C2.1 C02.1 C7.1 C8.1 C19.1 C20.1 C22.1 D1.1 J1.1 M1.2 M2.2 pad.1 pad.2 pad.3 pad.4 pad.5 pad.6 pad.7 pad.8 pad.9 pad.10 pad.11 pad.12 pad.13 pad.14 pad.15 pad.16 pad.17 pad.18 pad.19 pad.20 pad.21 pad.22 pad.23 pad.24 pad.25 pad.26 pad.27 pad.28 pad.29 pad.30 pad.31 pad.32 pad.33 pad.34 pad.35 pad.36 pad.37 pad.38 pad.39 pad.40 pad.41 pad.42 pad.43 pad.44 pad.45 pad.46 pad.47 pad.48 pad.49 pad.50 pad.51 pad.52 pad.53 pad.54 pad.55 pad.56 pad.57 pad.58 pad.59 pad.60 pad.61 pad.62 pad.63 pad.66 pad.67 pad.68 pad.69 pad.70 pad.71 pad.72 pad.73 pad.74 pad.75 pad.76 pad.137 pad.138 pad.139 pad.140 pad.141 pad.142 pad.143 pad.144 pad.145 pad.146 pad.147 pad.148 R20.1 R21.1 R22.1 R32.2 T1.1 | length 13797.5
  Top Layer w50: D1.1@49901,24162 49901,24260 49963,24322 C1.1@49963,24816 ; J1.1@50380,25393 50761,25393 50763,25395 ; R21.1@51121,23631 51121,23718 R20.1@51120,23719 ; T1.1@51328,23753 51154,23753 R20.1@51120,23719 ; C19.1@51987.62,25568 51987.62,25882.38 51619,26251 ; pad.32@52149,26826 52302,26673 M2.2@52302,26361 ; C20.1@54384,25576 54274,25686 54274,26733 53946,27061 52358,27061 52136,26839 51824,26839 51619,26634 51619,26251 ; C1.1@49963,24816 50750,24816 C8.1@50753,24819 ; C1.1@49963,24816 49973,24826 C7.1@49973,25996 50743,25996 C2.1@50763,25976 ; C8.1@50753,24819 50753,24297 50914,24136 R32.2@51195,24136 51195,24053 C02.1@51119,23977 51120,23976 C22.1@51120,23891 R22.1@51120,23807 R20.1@51120,23719 ; C8.1@50753,24819 C8.1@50753,24836 50763,24846 50763,25395 ; 50763,25395 C2.1@50763,25976 ; C2.1@50763,25976 50763,26184 50830,26251 51619,26251
AD2: HT1.7
AD3: C37.2 HT1.6 R42.1 | length 644.5
  Top Layer w10: R42.1@53582,23419 53647,23419 53672,23444 53672,23541 53738,23607 53871,23607 53889.21,23625.21 HT1.6@53889.21,23733
  Top Layer w15: R42.1@53582,23419 53582,23336 C37.2@53585,23333
AD4: HT1.18
AD5: HT1.17
AD6: C27.2 HT1.80 R30.1 | length 405.2
  Top Layer w10: C27.2@53575,23612 53668,23612 53711.06,23655.06 HT1.80@53711.06,23812.72
  Top Layer w15: C27.2@53575,23612 53579,23608 R30.1@53579,23520
AD7: C32.2 HT1.79 R35.1 | length 245
  Top Layer w10: C32.2@53574,23692 53574,23777 R35.1@53576,23779 53582,23779 53635.41,23832.41 HT1.79@53711.06,23832.41
BATTERY_LOW: HT1.62 U4.8 | length 1527.2
  Top Layer w10: HT1.62@53711.06,24167.05 53607.95,24167.05 53533,24242 53498,24242 53475,24265 53475,24695 53654,24874 54046,24874 54117,24803 U4.8@54117,24728
BUZZ: HT1.58 U4.6 | length 1025.6
  Top Layer w10: v1(53653,24711) 53653,24766 53693,24806 54000,24806 54017,24789 U4.6@54017,24728 ; v1(53783,24470) 53790,24470 53830.15,24429.85 HT1.58@53830.15,24266.46
  Bottom Layer w10: v1(53653,24711) 53653,24710 53783,24580 v1(53783,24470)
COM_S: C4.1 C5.2 C6.2 C9.1 C10.2 C11.2 C19.2 C20.2 C45.2 C46.2 C47.2 C48.2 LM1.2 M3.3 M4.3 pad.77 pad.78 pad.79 pad.80 pad.81 pad.82 pad.83 pad.84 pad.85 pad.86 pad.87 pad.88 pad.89 pad.90 pad.91 pad.129 pad.130 pad.131 pad.132 pad.133 pad.134 pad.135 pad.136 pad.149 pad.150 pad.151 pad.152 pad.153 pad.154 pad.155 pad.156 pad.157 pad.158 pad.159 pad.160 pad.161 pad.162 R1.2 R2.3 R2.4 R11.2 R12.2 T1.7 U1.2 U3.2 | length 13213.3
  Top Layer w20: R1.2@51595,24388 51595,24450 51668,24523 R2.4@51668,24661
  Top Layer w50: T1.7@51828,23553 52147,23553 C47.2@52150,23550 52290,23550 C48.2@52345,23605 52493,23605 LM1.2@52504,23616 52618,23616 C45.2@52636,23598 52728,23598 52755,23625 C46.2@52835,23625 ; C9.1@52834,25045 52876,25045 ; U1.2@52870,24635 52870,24667 52923,24720 52923,24808 C11.2@52886,24845 C10.2@52886,24945 52886,25035 52876,25045 ; v1(52965,25074) 52936,25045 52876,25045 ; v1(55324,25175) C4.1@55324,25020 55366,25020 55366,24935 C5.2@55371,24930 55371,24833 C6.2@55370,24832 55424,24778 U3.2@55424,24647
  Bottom Layer w50: R2.4@51668,24661 R2.3@51668,24961 52194,24961 52847,25614 53418,25614 C19.2@53464,25568 ; C46.2@52835,23625 52835,23814 53099,24078 53099,24370 52979,24490 52904,24490 52870,24524 U1.2@52870,24635 ; R12.2@53105,26129 53540,26129 pad.153@53546,26123 ; M4.3@53546,26356 pad.153@53546,26123 ; R11.2@55085,26140 55447,26140 55476,26169 M3.3@55476,26361 55486,26351 55661,26351 55860.38,26151.62 C20.2@55860.38,25667.62 ; v1(55324,25175) 55324,25495 55405,25576 C20.2@55860.38,25576 C20.2@55860.38,25667.62 ; v1@52975,25079 52970,25074 v1(52965,25074) 52970,25079 v1@52975,25079 ; v1@52975,25079 C19.2@53464,25568 ; C19.2@53464,25568 53546,25650 pad.153@53546,26123 ; C19.2@53464,25568 53664,25568 53851,25755 55773,25755 C20.2@55860.38,25667.62
DTR1: HT1.54 U6.2 U6.3 | length 2140.2
  Top Layer w10: HT1.54@53908.89,24266.46 53908.89,24172.11 53940,24141 v1(53989,24141) ; v1(55393,23639) 55393,23646 55430,23683 U6.3@55487,23683 U6.2@55487,23733
  Bottom Layer w10: v1(53989,24141) 53989,24216 54006,24233 54548,24233 54609,24172 54609,24079.12 54725.12,23963 54829,23963 55134,23658 55374,23658 v1(55393,23639)
EINT0: HT1.41 R23.1 | length 205.4
  Top Layer w10: HT1.41@54164.8,24266.46 54207.46,24266.46 54249,24308 R23.1@54249,24412
EN_INVERTER: C01.2 HT1.61 P4.2 R25.1 | length 3363.4
  Top Layer w10: C01.2@53591,24413 R25.1@53674,24413 v1@53674,24315 ; v1(53673,24316) v1@53674,24315 ; HT1.61@53711.06,24186.74 53711.06,24277.94 v1@53674,24315
  Bottom Layer w10: v1(53673,24316) 53673,24411 53678,24416 53898,24416 53992,24322 54584,24322 54703,24203 54703,24122 54778,24047 54867,24047 55152,23762 55244,23762 55327,23845 55621,23845 55792,23674 55792,23524 55900,23416 P4.2@55995,23416
ERROR: HT1.45 U2.7 | length 2802.3
  Top Layer w10: v1(51934,24226) 51937,24223 U2.7@52024,24223 ; v1(51986,24525) 53122,24525 v1(53213,24616) ; v1(53662,24610) 53820,24610 53871,24559 53968,24559 54040,24487 54040,24389 54086.06,24342.94 HT1.45@54086.06,24266.46
  Bottom Layer w10: v1(51934,24226) 51934,24473 v1(51986,24525) ; v1(53213,24616) 53218,24611 53225,24618 53654,24618 v1(53662,24610)